# EAGLE board Raspi-TPUART_v1.1_Final (EAGLE 8.7.1)
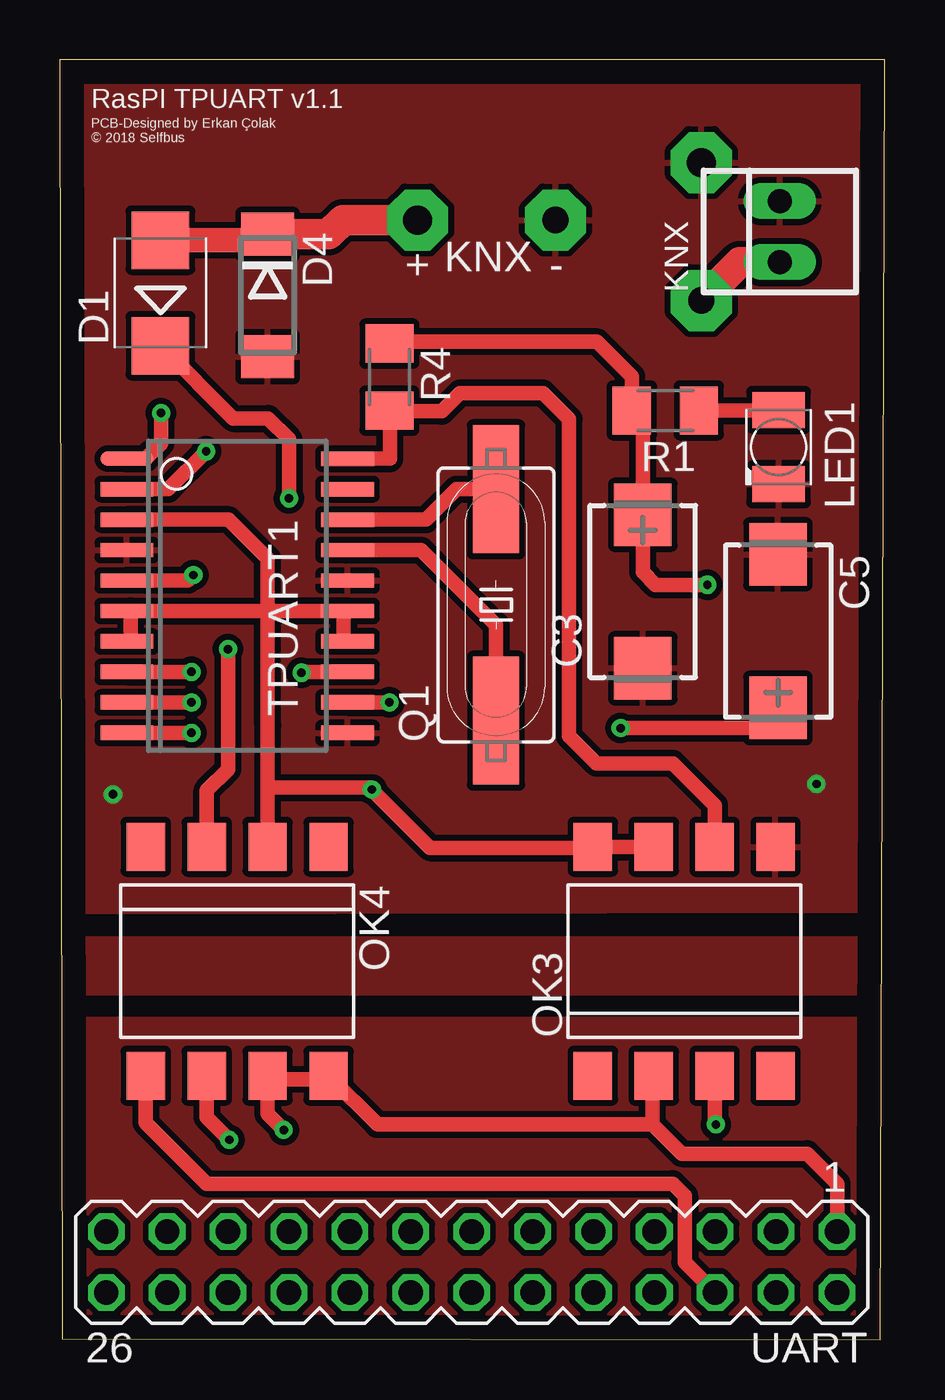
[diagram p0: board, top side]
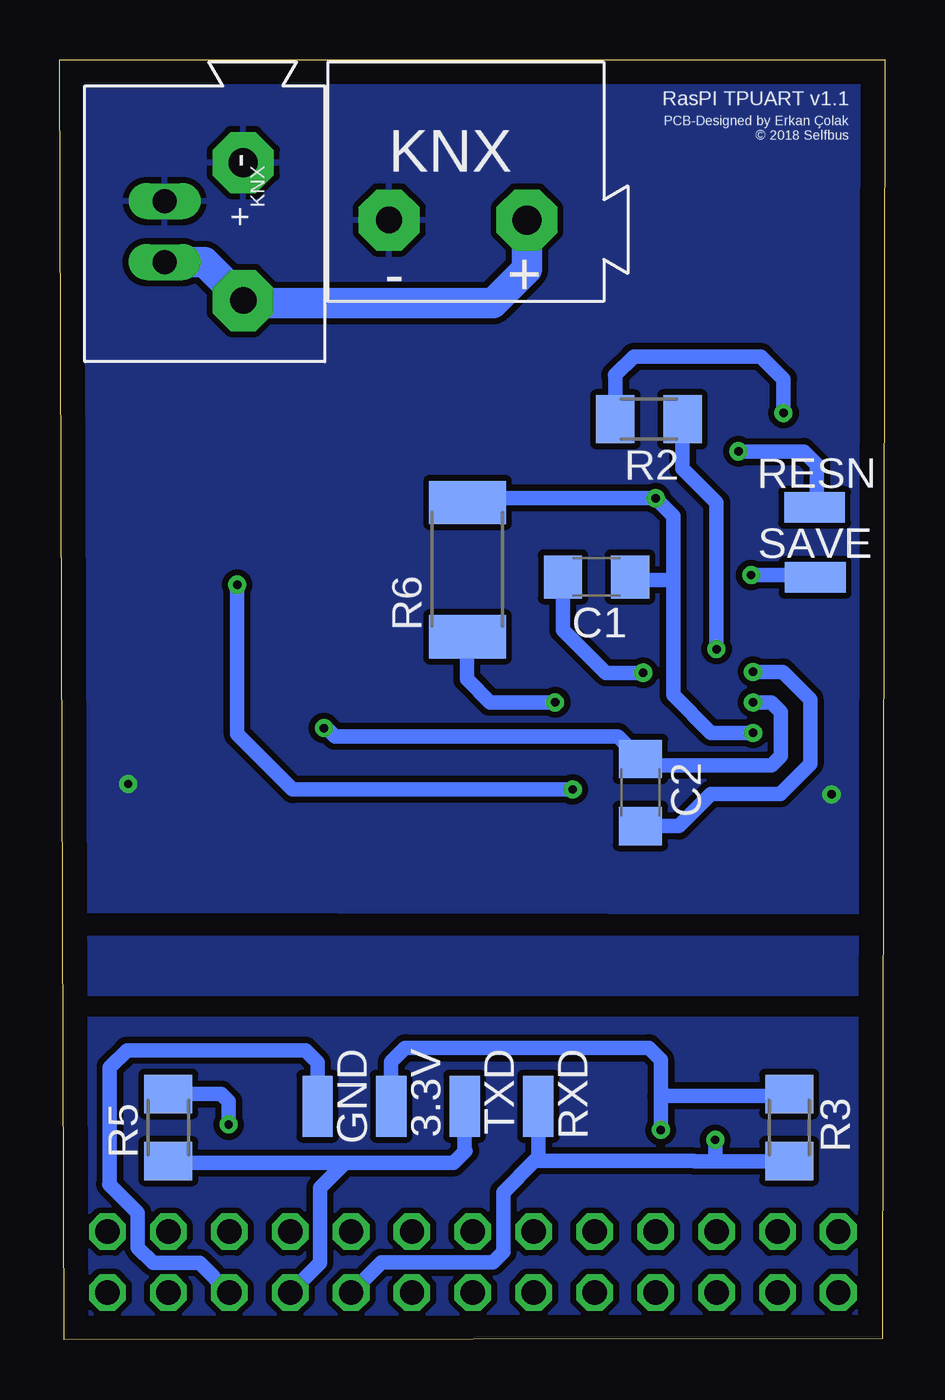
[diagram p1: board, bottom side, seen from below]

Size 34.39 x 53.36 mm. Coordinates in mm from the lower left corner, seen from the top.
Outline: 0.1,0.03 34.21,0 34.39,53.36 0,53.36 0.1,0.03
Copper layers (1*16): Top 0.035mm / dielectric 1.5mm / Bottom 0.035mm
Design rules "default": minimum track width 6mil, minimum drill 0.35mm, track to track 6mil, track to pad 6mil, pad to pad 6mil, via to via 6mil, smd to smd 6mil, copper to edge 40mil, drill to drill 6mil, minimum pad ring 10mil, minimum via ring 8mil, stop-mask expansion 4mil, vias tented up to drill 0mil, thermal gap 10mil
Net classes: 0 default: width 0.3 mm; 1 supply: width 0.6 mm

## Footprints (pad centres in the part's own frame; a part is rotated, then mirrored left to right if it is on the bottom)
SMD1,27-2,54 = smd 1.27 x 2.54: 1 0,0
C1206 = smd 1.6 x 1.8: 1 -1.4,0; 2 1.4,0
CT7343 = smd 2.6 x 2.4: + 3.2,0; - -3.2,0
SMB = smd 2.4 x 2.4: A 2.2,0; C -2.2,0
DO214AA = smd 1.8 x 2.2: A 2.55,0; C -2.55,0
22-23-2021 = drill 1 long: 1 -1.27,0; 2 1.27,0
243-211 = drill 1.1 pad 2.54 octagon: P$1 8.95,6.6 | drill 1.2 pad 2.54 octagon: P$2 3.2,6.6
KA-3528ASYC = smd 1.5 x 2.2: A -1.55,0; C 1.55,0
DIL8-SMD = smd 1.6 x 2: 1 -3.81,-4.77; 2 -1.27,-4.77; 3 1.27,-4.77; 4 3.81,-4.77; 5 3.81,4.77; 6 1.27,4.77; 7 -1.27,4.77; 8 -3.81,4.77
HC49UP = smd 5.334 x 1.93: 1 -4.826,0; 2 4.826,0
M1206 = smd 1.6 x 2: 1 -1.4,0; 2 1.4,0
R2512 = smd 1.8 x 3.2: 1 -2.8,0; 2 2.8,0
SOIC20 = smd 0.6 x 2.2: 1 -5.715,-4.6; 2 -4.445,-4.6; 3 -3.175,-4.6; 4 -1.905,-4.6; 5 -0.635,-4.6; 6 0.635,-4.6; 7 1.905,-4.6; 8 3.175,-4.6; 9 4.445,-4.6; 10 5.715,-4.6; 11 5.715,4.6; 12 4.445,4.6; 13 3.175,4.6; 14 1.905,4.6; 15 0.635,4.6; 16 -0.635,4.6; 17 -1.905,4.6; 18 -3.175,4.6; 19 -4.445,4.6; 20 -5.715,4.6
MA13-2 = drill 1.016 octagon: 1 -15.24,-1.27; 2 -15.24,1.27; 3 -12.7,-1.27; 4 -12.7,1.27; 5 -10.16,-1.27; 6 -10.16,1.27; 7 -7.62,-1.27; 8 -7.62,1.27; 9 -5.08,-1.27; 10 -5.08,1.27; 11 -2.54,-1.27; 12 -2.54,1.27; 13 0,-1.27; 14 0,1.27; 15 2.54,-1.27; 16 2.54,1.27; 17 5.08,-1.27; 18 5.08,1.27; 19 7.62,-1.27; 20 7.62,1.27; 21 10.16,-1.27; 22 10.16,1.27; 23 12.7,-1.27; 24 12.7,1.27; 25 15.24,-1.27; 26 15.24,1.27

## Placement (x,y rotation side)
3.3V  WIREPADSMD1,27-254  [SMD1,27-2,54]  20.58,9.73 180 bottom
C1  47n  [C1206]  12.01,31.8 180 bottom
C2  47n  [C1206]  10.19,22.81 270 bottom
C3  6.8µ  [CT7343]  24.31,31.19 90 top
C5  100µ  [CT7343]  29.95,29.54 270 top
D1  BYG21M - SMA  [SMB]  4.19,43.64 90 top
D4  SMAJ43CA  [DO214AA]  8.66,43.54 270 top
GND  WIREPADSMD1,27-254  [SMD1,27-2,54]  23.65,9.73 180 bottom
KNX  KNX  [22-23-2021]  30.02,46.2 90 top
KNX_WAGO_243  243-211  [243-211]  11.71,53.28 180 bottom
LED1  RED  [KA-3528ASYC]  29.97,37.21 270 top
OK3  6N137  [DIL8-SMD]  26.04,15.77 0 top
OK4  6N137  [DIL8-SMD]  7.39,15.77 180 top
Q1  4,915MHz  [HC49UP]  18.19,30.63 90 top
R1  4,7k  [M1206]  25.25,38.73 180 top
R2  330  [M1206]  9.83,38.38 180 bottom
R3  1k  [M1206]  3.98,8.84 270 bottom
R4  1k  [M1206]  13.74,40.13 270 top
R5  150  [M1206]  29.87,8.84 90 bottom
R6  68/1W  [R2512]  17.4,32.11 90 bottom
RESN  WIREPADSMD1,27-254  [SMD1,27-2,54]  2.92,34.7 270 bottom
RXD  WIREPADSMD1,27-254  [SMD1,27-2,54]  14.44,9.73 180 bottom
SAVE  WIREPADSMD1,27-254  [SMD1,27-2,54]  2.9,31.78 270 bottom
TPUART1  TP-UART  [SOIC20]  7.39,31.01 270 top
TXD  WIREPADSMD1,27-254  [SMD1,27-2,54]  17.51,9.73 180 bottom
U$1  243-211  [243-211]  33.35,52.27 270 bottom
UART  RasPI UART  [MA13-2]  17.17,3.23 180 top

## Library data of the parts
3.3V GND RESN RXD SAVE TXD = wirepad
C1-C3 C5 R1-R6 = resistor
D1 D4 = diode
KNX = con-molex; MF: MOLEX; MPN: 22-23-2021; OC_FARNELL: 1462926; OC_NEWARK: 25C3832
KNX_WAGO_243 U$1 = wago-243
LED1 = led
OK3 OK4 = optocoupler
Q1 = crystal; OC_FARNELL: unknown; OC_NEWARK: unknown
TPUART1 = tpuart-actiface
UART = con-lstb; OC_FARNELL: unknown; OC_NEWARK: unknown

## Nets
CSA: C2.2 TPUART1.8
GND [supply]: C3.- C5.- D4.A KNX.2 KNX_WAGO_243.P$1 LED1.C OK3.5 TPUART1.4 TPUART1.11 TPUART1.16 U$1.P$2
GNDINT [supply]: GND.1 OK4.5 UART.6
KNX+ [supply]: D1.A D4.C KNX.1 KNX_WAGO_243.P$2 U$1.P$1
N$14: OK3.3 R5.2
N$18: LED1.A R1.1
RASPI_RXD: OK4.6 R3.2 RXD.1 UART.10
RASPI_TXD: R5.1 TXD.1 UART.8
RESN: RESN.1 TPUART1.2
RXD: OK3.6 R4.2 TPUART1.20
RXIN: C1.2 TPUART1.13
SAVE: SAVE.1 TPUART1.5
TXD: R2.2 TPUART1.1
TXD1: OK4.3 R2.1
TXO: R6.1 TPUART1.12
VB+ [supply]: C1.1 D1.C R6.2 TPUART1.10
VCC [supply]: C3.+ OK3.7 OK3.8 OK4.2 R1.2 R4.1 TPUART1.3 TPUART1.6 TPUART1.7 TPUART1.14 TPUART1.15
VCCINT [supply]: 3.3V.1 OK3.2 OK4.7 OK4.8 R3.1 UART.1
VSP: C2.1 C5.+ TPUART1.9
X1: Q1.1 TPUART1.17
X2: Q1.2 TPUART1.18

## Tracks (layer width: path | path; a pad name or v marks a point on that pad's centre or on a via)
CSA  (via drill 0.35)
  Top 0.61: TPUART1.8 v5.49,27.84
  Bottom 0.61: v5.49,27.84 4.24,27.84 3.1,26.7 3.1,24 4.34,22.76 7.24,22.76 8.59,21.41 C2.2
GND  (via drill 0.35)
  other vias: 31.55,23.16 2.21,22.73
  pour Top (isolate 0.254): 0.18,53.19 34.21,53.19 34.09,17.86 0.23,17.78
  pour Bottom (isolate 0.254): 0.18,53.19 0.23,17.78 34.09,17.86 34.21,53.19
GNDINT
  Top 0.6: OK4.5
  Top 0.61: OK4.5 3.58,9.04 6.12,6.5 25.55,6.5 26.06,5.99 26.06,3.23 UART.6
  Bottom 0.61: UART.6 28.58,3.2 30.51,3.2 31.14,3.84 31.14,5.28 32.33,6.48 32.31,6.5 32.31,11.35 31.6,12.07 24.16,12.07 23.65,11.56 GND.1 23.65,9.86
KNX+
  Top 0.61: 8.41,45.84 D4.C
  Top 1.016: D1.A 8.41,45.84
  Top 1.27: D4.C 11.21,46.09 11.81,46.68 KNX_WAGO_243.P$2 | KNX.1 28.36,44.93 U$1.P$1
  Bottom 1.27: KNX_WAGO_243.P$2 14.92,44.62 16.33,43.21 26.63,43.21 U$1.P$1 28.36,44.93 KNX.1
N$2
  pour Top (isolate 0.254): 0.38,13.39 0.38,0.33 33.99,0.28 34.06,13.39
N$11
  pour Bottom (isolate 0.254): 0.38,13.39 34.06,13.39 33.99,0.28 0.38,0.33
N$13
  pour Top: 0.38,16.76 33.96,16.76 33.96,14.38 0.38,14.4
N$14  (via drill 0.35)
  Top 0.61: 27.36,10.95 OK3.3 27.31,9.02 v27.36,8.97
  Bottom 0.61: R5.2 27.66,10.24 27.36,9.93 v27.36,8.97
N$15
  pour Bottom: 0.38,16.76 33.96,16.76 33.96,14.38 0.38,14.4
N$18
  Top 0.61: R1.1 29.95,38.74 LED1.A
RASPI_RXD  (via drill 0.35)
  Top 0.3: 6.12,10.69 OK4.6
  Top 0.508: OK4.6 6.12,10.95
  Top 0.61: OK4.6 6.12,9.27 v7.06,8.33
  Bottom 0.61: RXD.1 14.44,7.62 14.45,7.61 14.45,7.59 14.61,7.44 | UART.10 20.98,3.23 16.33,3.23 15.9,3.66 15.9,6.15 14.61,7.44 | 14.61,7.44 7.95,7.44 7.94,7.44 7.09,7.44 | R3.2 7.09,7.44 | v7.06,8.33 7.06,7.46 7.09,7.44
RASPI_TXD
  Bottom 0.61: UART.8 23.55,3.2 23.55,6.32 22.5,7.37 | R5.1 29.8,7.37 22.5,7.37 | 22.5,7.37 17.98,7.37 17.48,7.87 17.51,7.91 TXD.1
RESN  (via drill 0.35)
  Top 0.61: TPUART1.2 4.52,35.46 v6.1,37.03
  Bottom 0.61: v6.1,37.03 3.38,37.03 2.82,36.47 2.82,34.8 RESN.1
RXD
  Top 0.61: OK3.6 27.31,22.28 25.55,24.03 22.38,24.03 21.23,25.17 21.23,38.38 20.14,39.47 16.69,39.47 15.93,38.71 13.76,38.71 | 13.76,38.71 R4.2 | TPUART1.20 13.76,36.73 13.76,38.71
RXIN  (via drill 0.35)
  Top 0.3: TPUART1.13 11.2,27.84
  Top 0.61: 11.2,27.84 10.11,27.84 v10.07,27.8
  Bottom 0.61: v10.07,27.8 11.62,27.8 13.41,29.59 C1.2
SAVE  (via drill 0.35)
  Top 0.61: v5.56,31.88 5.33,31.65 TPUART1.5
  Bottom 0.61: SAVE.1 3,31.88 v5.56,31.88
TXD  (via drill 0.35)
  Top 0.3: 2.95,36.73 TPUART1.1
  Top 0.61: TPUART1.1 3.58,36.73 4.22,37.36 v4.22,38.63
  Bottom 0.61: v4.22,38.63 4.22,40.06 5.16,41 10.47,41 11.25,40.21 11.23,40.19 R2.2
TXD1  (via drill 0.35)
  Top 0.61: OK4.3 6.12,22.89 7.01,23.77 v7.01,28.79
  Bottom 0.61: R2.1 8.43,36.32 7.01,34.9 v7.01,28.79
TXO  (via drill 0.35)
  Top 0.61: TPUART1.12 v13.74,26.57
  Bottom 0.61: 16.45,29.03 R6.1 17.42,29.28 17.42,27.53 16.46,26.57 v13.74,26.57
VB+  (via drill 0.35)
  Top 0.6: TPUART1.10 v5.49,25.3
  Top 0.61: 4.19,41.3 D1.C 7.22,38.4 8.69,38.4 9.55,37.54 v9.55,35.08
  Bottom 0.61: v5.49,25.3 7.24,25.3 8.81,26.87 8.81,31.67 | 8.81,31.67 8.81,34.34 v9.55,35.08 17.23,35.08 R6.2 | 8.81,31.67 10.49,31.67 C1.1
VCC  (via drill 0.35)
  Top 0.6: TPUART1.7 2.95,29.11 2.95,30.38 TPUART1.6 | 8.66,25.62 8.66,23.01 OK4.2 | 11.84,30.38 TPUART1.15 | 11.84,29.11 TPUART1.14
  Top 0.61: 11.84,29.11 11.84,30.22 TPUART1.15 8.79,30.38 | 24.71,20.59 OK3.7 OK3.8 22.18,20.5 15.44,20.5 v13.01,22.94 12.93,23.01 8.66,23.01 | 8.66,25.62 8.66,30.25 | 8.79,30.38 8.66,30.25 | R4.1 13.81,41.61 22.4,41.61 23.85,40.16 R1.2 24.31,38.27 C3.+ | 2.95,30.38 8.79,30.38 | 8.66,30.25 8.66,32.56 7.04,34.19 TPUART1.3 | v27,31.47 24.84,31.47 24.31,32 C3.+ | C3.+ 24.28,34.42
  Bottom 0.61: v13.01,22.94 24.69,22.94 27,25.25 v27,31.47
VCCINT  (via drill 0.35)
  Top 0.6: 11.2,10.69 OK4.8 | 11.06,10.48 OK4.8 | 8.69,10.93 OK4.7 | OK4.7 8.98,10.85 10.88,10.85 OK4.8 | 8.98,10.53 OK4.7
  Top 0.61: OK4.8 13.24,8.97 24.71,8.97 | UART.1 32.41,6.5 31.17,7.75 25.93,7.75 24.71,8.97 | 24.71,8.97 24.71,10.95 OK3.2 | OK4.7 8.66,9.41 v9.33,8.74
  Bottom 0.61: 3.3V.1 20.58,11.58 19.99,12.17 9.83,12.17 9.33,11.67 9.33,10.16 | 9.33,10.16 v9.33,8.74 | R3.1 4.06,10.16 9.33,10.16
VSP  (via drill 0.35)
  Top 0.61: v5.49,26.57 TPUART1.9 | v23.38,25.5 28.98,25.5 C5.+
  Bottom 0.61: v23.38,25.5 23.33,25.55 22.92,25.15 11.12,25.15 C2.1 9.9,23.93 4.72,23.93 4.32,24.33 4.32,26.16 4.72,26.57 v5.49,26.57
X1
  Top 0.61: TPUART1.17 15.06,32.92 18.19,29.79 Q1.1
X2
  Top 0.61: TPUART1.18 15.27,34.19 16.54,35.46 Q1.2

## Text on the board
tNames: RasPI TPUART v1.1 | PCB-Designed by Erkan Çolak / © 2018 Selfbus | + | KNX | -
bNames: RasPI TPUART v1.1 | PCB-Designed by Erkan Çolak / © 2018 Selfbus | KNX | - | KNX | + | + | -